# Altium PCB TAUV-Backup_power_PCB.PcbDoc
Units mil, origin at the board's own origin, x right, y up, seen from the top; angles counter-clockwise.
Board outline 4765 x 3420 mil, 2 copper layers (Top Layer, Bottom Layer); 44 components, 16 nets, 156 pads, 79 vias.
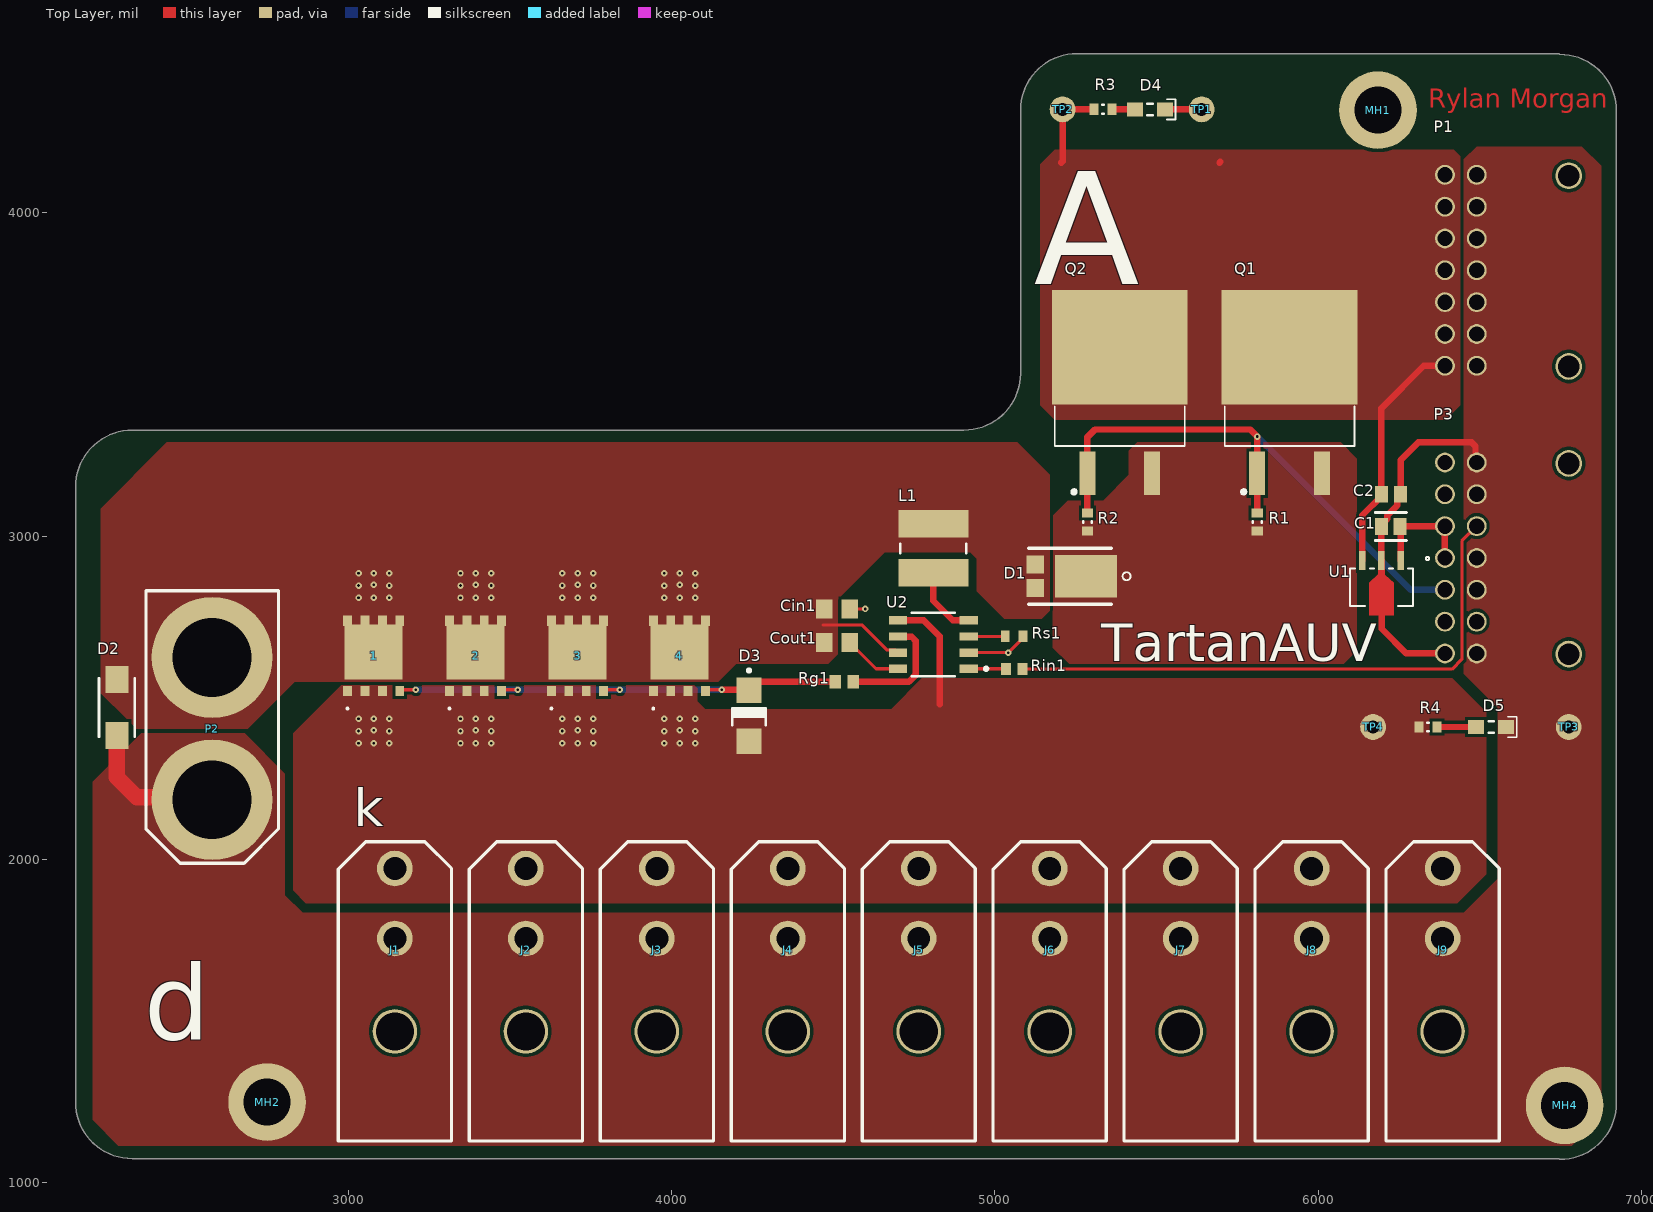
[diagram p0: Top Layer view]
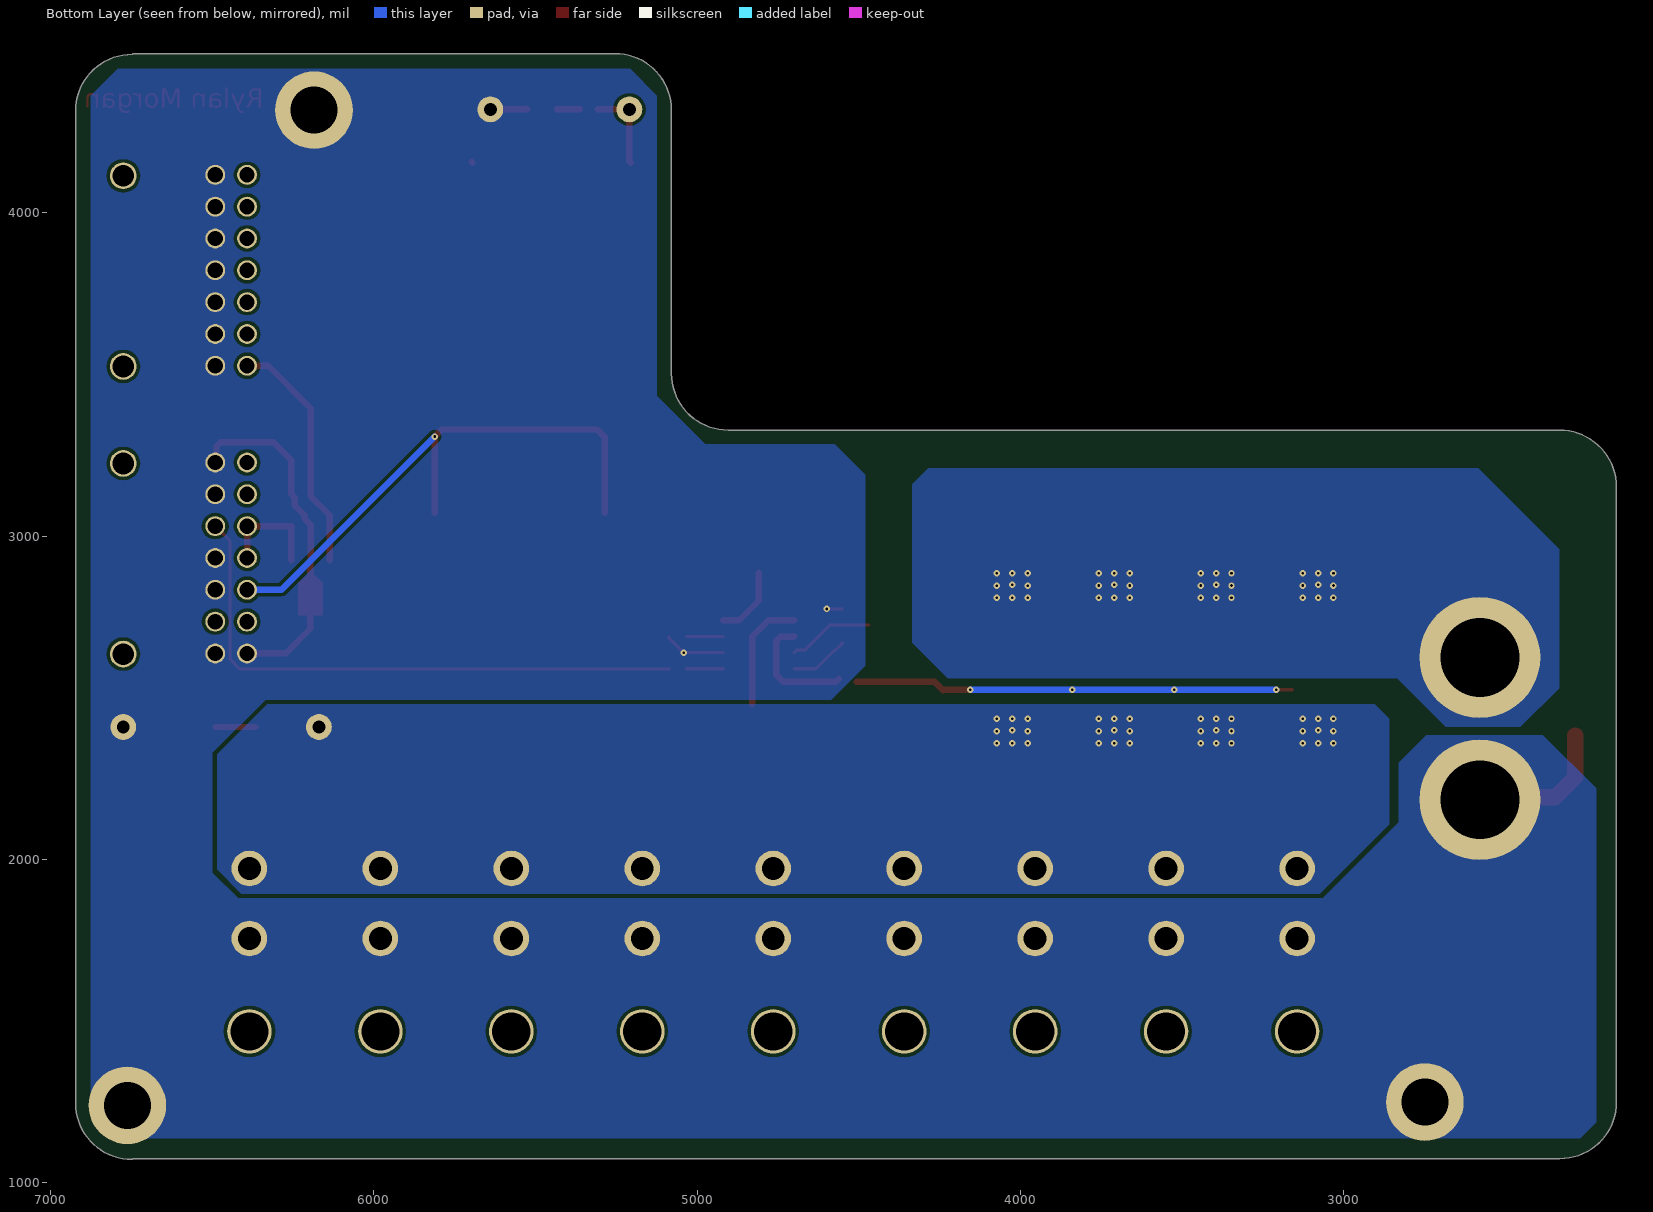
[diagram p1: Bottom Layer view, seen from below]
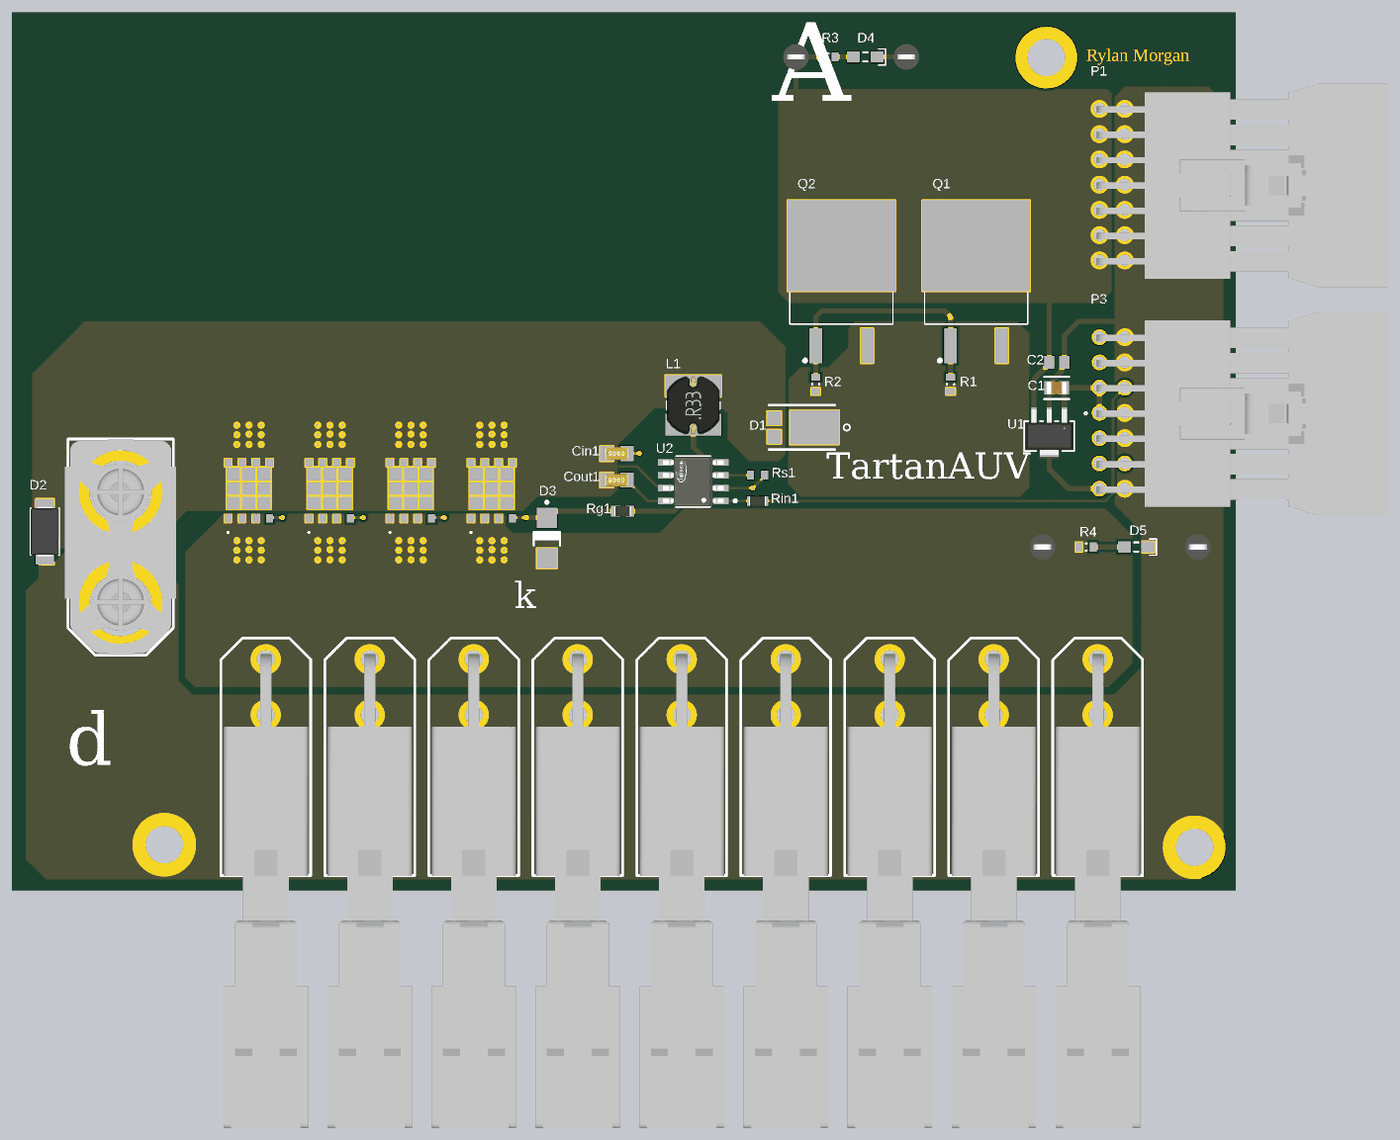
[diagram p2: 3D render of the assembled board from above, using the file's embedded part models]

## Layer stack, top to bottom
Top Solder: solder mask 0.4, Solder Resist, Dk 3.5
Top Layer: signal copper 1.4
Dielectric 1: dielectric 12.6, FR-4, Dk 4.8
Bottom Layer: signal copper 1.4
Bottom Solder: solder mask 0.4, Solder Resist, Dk 3.5

## Board outline
2157.5,1250 2157.5,3152.83 2157.74,3152.83 cw(c2332.74,3152.83) 2332.74,3327.83 4904.67,3327.83 4904.67,3328.04 ccw(c4904.67,3503.04) 5079.67,3503.04 5079.67,4317.43 cw(c5254.68,4317.42) 5254.68,4492.43 5254.68,4492.5 6745,4492.5 6747.5,4490 cw(c6747.5,4315) 6922.5,4315 6922.5,4317.5 6922.5,1247.5 cw(c6747.5,1247.5) 6747.5,1072.5 6745,1075 2332.5,1075 cw(c2332.5,1250)

## Design rules (kind name [scope] priority, off if disabled: settings)
Clearance [All] p1: gap=10 ignorepadtopadclearanceinfootprint=FALSE except(0: Arc-Hole Track-Hole SMDPad-Hole THPad-Hole Via-Hole Fill-Hole Poly-Hole Region-Hole Text-Hole)
PolygonConnect [All] p1: connectstyle=Direct reliefconductorwidth=10 reliefentries=4 polygonreliefangle="90 Angle" airgapwidth=10
RoutingVias [All] p1: holewidth=28 width=50 viastyle="Through Hole" minholewidth=28 minwidth=50 maxholewidth=28 maxwidth=50
SolderMaskExpansion [All] p1: expansion=4 istentingtop=FALSE
Width [All] p1: maxlimit=100 minlimit=8 preferedwidth=10
30 further rules are at their usual default settings.

## Components (designator, comment, footprint, x,y, rotation, side; value= is the part's Value field where it differs from the comment)
1 "BSC0702LSATMA1" TRANS_NexFET_Q5A 3079.06,2630.09 r90 top value=Value
2 "BSC0702LSATMA1" TRANS_NexFET_Q5A 3394.37,2630.09 r90 top value=Value
3 "BSC0702LSATMA1" TRANS_NexFET_Q5A 3709.69,2630.09 r90 top value=Value
4 "DNP" TRANS_NexFET_Q5A 4025,2630 r90 top value=Value
C1 "GRM21BR61E106KA73L" FP-GRM21B-0_15-IPC_C 6225,3030 r0 top
C2 "GRM21BR71H105KA12L" CAPC2013X135X45LL10T25 6225.47,3129.53 r180 top
Cin1 "X7R" C0805 4512.36,2774.64 r180 top value=1uF
Cout1 "X7R" C0805 4512.36,2671.12 r180 top value=1uF
D1 "SBRT15U50SP5-13" SBRT15U50SP5-13 5281.77,2876.22 r270 top
D2 "SMAJ30CA" LFUS-DO-214AC-A-2_V 2285,2470 r270 top
D3 "1SMA5931BT3G" ONSC-SMA-2-403D-02_F_V 4240,2445 r270 top
D4 "LED GREEN" LED_0805 5480,4320 r180 top
D5 "LED GREEN" LED_0805 6535,2410 r180 top
J1 "2-pin megafit" "2-pin Megafit RA" 3145,1130 r0 top
J2 "2-pin megafit" "2-pin Megafit RA" 3550,1130 r0 top
J3 "2-pin megafit" "2-pin Megafit RA" 3955,1130 r0 top
J4 "2-pin megafit" "2-pin Megafit RA" 4360,1130 r0 top
J5 "2-pin megafit" "2-pin Megafit RA" 4765,1130 r0 top
J6 "2-pin megafit" "2-pin Megafit RA" 5170,1130 r0 top
J7 "2-pin megafit" "2-pin Megafit RA" 5575,1130 r0 top
J8 "2-pin megafit" "2-pin Megafit RA" 5980,1130 r0 top
J9 "2-pin megafit" "2-pin Megafit RA" 6385,1130 r0 top
L1 "74477420" WE-PD2-M 4810,2962.21 r90 top
MH1 "DNP" "Mounting Hole #4-40" 6185,4317.5 r0 top
MH2 "DNP" "Mounting Hole #4-40" 2750,1250 r0 top
MH4 "DNP" "Mounting Hole #4-40" 6762.5,1240 r0 top
P1 "14-Pin 2-Row Nano-Fit Right Angle" "MOLEX NANO-FIT 2X7 - Right Angle" 6490.55,3526.97 r90 top
P2 "XT90" XT90 2580,2185 r90 top
P3 "14-Pin 2-Row Nano-Fit Right Angle" "MOLEX NANO-FIT 2X7 - Right Angle" 6490.55,2637.4 r90 top
Q1 "IRF9Z34STRLPBF" TO254P1521X483-4N 5911.77,3444.28 r90 top
Q2 "IRF9Z34STRLPBF" TO254P1521X483-4N 5386.77,3444.28 r90 top
R1 "4K7" RESC0603(1608)_L 5811.77,3044.28 r270 top value="4700.00 Ohm"
R2 "4K7" RESC0603(1608)_L 5286.77,3044.28 r270 top value="4700.00 Ohm"
R3 "1K2" RESC0603(1608)_L 5335,4320 r180 top value="1200.00 Ohm"
R4 "1K2" RESC0603(1608)_L 6340,2410 r180 top value="1200.00 Ohm"
Rg1 "CRCW0603100RFKEA" RESC1609X50X30ML8T20 4535,2550 r180 top
Rin1 "CRCW060310K0FKEA" RESC1609X50X30NL8T20 5060,2589.21 r180 top
Rs1 "RC0603FR-0710RL" RESC1608X55X25NL10T15 5060,2690 r180 top
TP1 "Test Point Loop" "Test Point Loop - Black" 5640,4320 r0 top
TP2 "Test Point Loop" "Test Point Loop - Black" 5210,4320 r0 top
TP3 "Test Point Loop" "Test Point Loop - Black" 6775,2410 r0 top
TP4 "Test Point Loop" "Test Point Loop - Black" 6170,2410 r0 top
U1 "AP7387Q-33Y-13" SOT-89-3_2P7X4P7_ONS 6195.94,2842.5 r180 top
U2 "AUIR3241STR" FP-PG-DSO-8-MFG 4810,2665 r180 top

## Footprints (in the part's own frame and the unit in brackets; to place one, negate y for a bottom-side part, rotate by r counter-clockwise, add the part's x,y. Pads: shape width x height; smd on the part's side, far side on the other; paste and mask are expansions set on the pad)
"2-pin Megafit RA" [mm]
  round 2.8 hole 1.8: 1(0,15.9) 2(0,21.4)
  round 3.5 hole 3: ""(0,8.6)
  silkscreen extent -4.44,0 4.44,23.49, body extent -4.16,-24.98 4.19,21.9, height 16.75
C0805 [mm]
  rect 1.321x1.5 smd: 1(-1,0) 2(1,0)
  body extent -1.25,-0.62 1.25,0.62, height 0.8
CAPC2013X135X45LL10T25 [mm] "Chip Capacitor, 2-Leads, Body 2.00x1.25mm, IPC High Density"
  rect 1x1.3 smd: 1(-0.75,0) 2(0.75,0)
  body extent -1.05,-0.67 1.05,0.68, height 1.35
FP-GRM21B-0_15-IPC_C [mil]
  rect 39.6x51.5 smd paste+0 mask+0: 1(-28.59,0) 2(28.59,0)
  silkscreen extent -48,-43 48,43, body extent -52,-31 52,31, height 10
FP-PG-DSO-8-MFG [mm]
  rect 1.45x0.65 smd paste+0 mask+0: 1(-2.775,1.905) 2(-2.775,0.635) 3(-2.775,-0.635) 4(-2.775,-1.905) 5(2.775,-1.905) 6(2.775,-0.635) 7(2.775,0.635) 8(2.775,1.905)
  silkscreen extent -4.28,-2.5 1.68,2.5, body extent -3.6,-2.6 3.6,2.6, height 0.25
LED_0805 [mm] "Liteon 0805 Chip LED"
  rect 1.25x1.1 smd: 1(-1.175,0) 2(1.175,0)
  silkscreen extent -2.01,-0.8 0.2,0.8, body extent -1,-0.63 1,0.63, height 0.8
LFUS-DO-214AC-A-2_V [mm] "Molded Diode, 2-Leads, Body 4.6x2.79mm"
  rect 2.1x1.8 smd: 1(-2.2,0) 2(2.2,0)
  silkscreen extent -2.3,-1.4 2.3,1.4, body extent -2.52,-1.4 2.52,1.4, height 2.29
"MOLEX NANO-FIT 2X7 - Right Angle" [mm]
  round 1.56 hole 1.2: 1(15,2.5) 2(12.5,2.5) 3(10,2.5) 4(7.5,2.5) 5(5,2.5) 6(2.5,2.5) 7(0,2.5) 8(15,0) 9(12.5,0) 10(10,0) 11(7.5,0) 12(5,0) 13(2.5,0) 14(0,0)
  round 2.1 hole 1.7: ""(-0.05,-7.225) ""(14.925,-7.225)
  body extent -2.68,-26.05 17.53,2.78, height 10.21
"Mounting Hole #4-40" [mm] "Mounting Hole for ANSI #4-40 w/ Flat Washer, Loose Fit"
  round 6.1 hole 3.7: 0(0,0)
ONSC-SMA-2-403D-02_F_V [mm] "Molded, 2-Leads, Body 4.32x2.6mm"
  rect 2x2 smd: 1(-2,0) 2(2,0)
  silkscreen extent -3.67,-1.3 0.74,1.3, body extent -2.16,-1.3 2.16,1.3, height 2.2
RESC0603(1608)_L [mm] "Chip Resistor, Body 1.6x0.8mm, IPC High Density"
  rect 0.7x0.9 smd: 1(-0.7,0) 2(0.7,0)
  silkscreen extent -0.05,-0.35 0.05,0.35, body extent -0.85,-0.47 0.85,0.47, height 0.6
RESC1608X55X25NL10T15 [mm] "Chip Resistor, 2-Leads, Body 1.70x0.90mm, IPC Medium Density"
  rect 0.7x0.9 smd: 1(-0.7,0) 2(0.7,0)
  body extent -0.85,-0.45 0.85,0.45, height 0.55
RESC1609X50X30ML8T20 [mm] "Chip Resistor, 2-Leads, Body 1.65x0.95mm, IPC Low Density"
  rect 0.9x1.05 smd: 1(-0.7,0) 2(0.7,0)
  body extent -0.82,-0.48 0.82,0.48, height 0.5
RESC1609X50X30NL8T20 [mm] "Chip Resistor, 2-Leads, Body 1.65x0.95mm, IPC Medium Density"
  rect 0.8x0.95 smd: 1(-0.65,0) 2(0.65,0)
  body extent -0.82,-0.48 0.82,0.48, height 0.5
SBRT15U50SP5-13 [mm]
  rect 1.39x1.4 smd: 1(-0.92,-3.982) 1(0.92,-3.982)
  rect 3.36x4.86 smd: 2(0,0)
  silkscreen extent -2.2,-4.5 2.2,3.52, body extent -2,-4.6 2,2.4, height 1.05
SOT-89-3_2P7X4P7_ONS [mil]
  rect 20x59 smd paste+0 mask+0: 1(-59.06,-82.5) 2(0,-82.5) 3(59.06,-82.5)
  Top Layer region: 10,-53 -10,-53 -10,-39 -38,-13 -38,87 38,87 38,-13 10,-40
  silkscreen extent -148,-93 98,58, body extent -93,-104 93,73, height 69
"Test Point Loop - Black" [mil] ", black"
  round 80 hole 40: 1(0,0)
  body extent -50,-50 50,50, height 180
TO254P1521X483-4N [mil]
  rect 135x49.49 smd: 1(-250,100) 3(-250,-100)
  rect 355x420 smd: 4(140,0)
  silkscreen extent -316,-201 -43,201
TRANS_NexFET_Q5A [mm]
  rect 0.8x0.7 smd paste-0.387: 1(-2.752,2.055) 2(-2.752,0.685) 3(-2.752,-0.685) 4(-2.752,-2.055) 5(2.752,-2.055) 6(2.752,-0.685) 7(2.752,0.685) 8(2.752,2.055)
  rect 4.3x4.56 smd paste-2.267 mask+0.025: 9(0.3,0)
  silkscreen extent -4.22,1.98 -4.07,2.13, body extent 0,0 0.25,0.25, height 0.25
WE-PD2-M [mm] "SMD Inductor, 2-Leads, Body 5.8 x 5.2 mm"
  rect 2.15x5.5 smd: 1(-1.925,0) 2(1.925,0)
  silkscreen extent -0.38,-2.6 0.38,2.6, body extent -2.89,-2.6 2.89,2.6, height 4.49
XT90 [mm]
  round 9.5 hole 6.2: 1(0,0) 2(11.176,0)
  silkscreen extent -4.99,-5.21 16.41,5.21, body extent -4.99,-5.5 16.41,5.5, height 20.7

## Part data
1 2 3: "No Description Available", Manufacturer_Name="Texas Instruments", Manufacturer_Part_Number=CSD18537NQ5A, Copyright="Copyright (C) 2018 Accelerated Designs. All rights reserved", Datasheet_URL=http://www.ti.com/lit/ds/symlink/csd18537nq5a.pdf, IdsMax=50.0, QgTyp=14.0, Quantity=1, Rdson45=0.014559, RefDes=RefDes, Type=TYPE, VdsMax=60.0, Vendor="Texas Instruments"
4: library part BSC0702LSATMA1, "No Description Available", Manufacturer_Name="Texas Instruments", Manufacturer_Part_Number=CSD18537NQ5A, Copyright="Copyright (C) 2018 Accelerated Designs. All rights reserved", Datasheet_URL=http://www.ti.com/lit/ds/symlink/csd18537nq5a.pdf, IdsMax=50.0, QgTyp=14.0, Quantity=1, Rdson45=0.014559, RefDes=RefDes, Type=TYPE, VdsMax=60.0, Vendor="Texas Instruments"
C1: library part CMP-2007-03541-2, "Chip Multilayer Ceramic Capacitors for General Purpose, 0805, 10uF, X5R, 15%, 10%, 25V", Capacitance=10uF, Case Code (Imperial)=0805, Case Code (Metric)=2012, Dielectric=X5R, Max Operating Temperature=85°C, Min Operating Temperature=-55°C, Package Quantity=1, Tolerance=10%, Voltage=25V, Case/Package=0805, Depth=1.25mm, Height=1.25mm, Lead Free="Lead Free", Length=2mm, Material=Ceramic, Mount="Surface Mount", Packaging="Tape and Reel", Radiation Hardening=No, Termination=SMD/SMT, Thickness=0.053inch, Voltage Rating=25V, Voltage Rating (DC)=25V, Width=0.049inch
C2: library part CMP-1036-04761-2, "1uF", Manufacturer=Murata, Part Number=GRM21BR71H105KA12L
Cin1 Cout1: library part Cap, "Capacitor", LatestRevisionDate=17-Jul-2002, LatestRevisionNote="Re-released for DXP Platform.", PackageDescription="Radial Cap, Thru-Hole; 2 Leads; 0.3 in Pin Spacing", PackageReference=RAD-0.3, Published=8-Jun-2000, Publisher="Altium Limited"
D1: Capacitance @ Vr, F=-, Current - Average Rectified (Io)=15A, Manufacturer="Diodes Incorporated", Operating Temperature - Junction="-65°C ~ 150°C", Package / Case="PowerDI™ 5", Supplier Device Package=PowerDI®5, Supplier Part Number 1=SBRT15U50SP5-13DICT-ND, Category="Discrete Semiconductor Products", ComponentLink1Description=https://media.digikey.com/pdf/Data%20Sheets/Diodes%20PDFs/SBRT15U50SP5.pdf, ComponentLink1URL=https://media.digikey.com/pdf/Data%20Sheets/Diodes%20PDFs/SBRT15U50SP5.pdf, Diode Type="Super Barrier", Manufacturer Part Number=SBRT15U50SP5-13, Mounting Type="Surface Mount", Packaging="Cut Tape (CT)", Part Status=Active, Pricing 1="1=0.93, 10=0.823, 100=0.6306, 500=0.49852, 1000=0.39882 (USD)", RoHS="RoHS Compliant", Speed="Fast Recovery =< 500ns, > 200mA (Io)", Stock 1=12134, Supplier 1=Digi-Key
D2: library part CMP-2000-07088-1, "Transient Voltage Suppression Diode, 30 V, -65 to 150 degC, 2-Pin SMD, RoHS, Tape and Reel", Capacitance @ Frequency=-, Current - Peak Pulse (10/1000µs)=8.3A, Manufacturer=Littelfuse-Inc., Operating Temperature=-55°C~150°C(TJ), Package / Case=DO-214AC,SMA, Package Description="2-Pin Surface Mount Device, Body 4.295 x 2.595 mm", Package Reference=DO-214AC, Power - Peak Pulse=400W, Power Line Protection=No, Supplier Device Package=DO-214AC(SMA), Voltage - Breakdown (Min)=33.3V, Voltage - Clamping (Max) @ Ipp=48.4V, Voltage - Reverse Standoff (Typ)=30V, Applications=GeneralPurpose, Bidirectional Channels=1, Category=CircuitProtection, Datasheet URL=http://www.littelfuse.com/~/media/electronics/datasheets/tvs_diodes/littelfuse_tvs_diode_smaj_datasheet.pdf.pdf, Datasheet Version=11/2015, Family=TVS-Diodes, Manufacturer URL=http://www.littelfuse.com/, Mounting Technology=SurfaceMount, Mounting Type=SurfaceMount, Packaging=Digi-Reel®, Series=SMAJ, Type=Zener, Unidirectional Channels=-
D3: library part CMP-1060-00118-1, "1.5 W Zener Voltage Regulator, 2-Pin SMA, Pb-Free, Tape and Reel", Manufacturer="On Semiconductor", ComponentLink1Description="Manufacturer URL", ComponentLink1URL=http://www.onsemi.com/, ComponentLink2Description=Datasheet, ComponentLink2URL=http://www.onsemi.com/pub_link/Collateral/1SMA5913BT3-D.PDF, ComponentLink3Description="Package Specification", ComponentLink3URL=http://www.onsemi.com/pub_link/Collateral/1SMA5913BT3-D.PDF, DatasheetVersion="Rev. 8", Mounting Technology="Surface Mount", PackageDescription="2-Pin Small Molded Package, J-Bend Lead, Body 2.605 x 4.315 mm", PackageReference=SMA-2-403D-02_F, PackageVersion="Rev. F, 11/2008", Packing="Tape and Reel", PartNumber=1SMA5931BT3G, RoHS=Pb-Free, VZ Typ (V)=18
D4 D5: library part LED0, "led", Color=Green, Current - Test=20mA, Lens Color=Colorless, Manufacturer="Lite-On Inc.", Manufacturer Part Number=LTST-C171KGKT, Millicandela Rating=35mcd, Package / Case="0805 (2012 Metric)", Supplier Part Number 1=160-1426-1-ND, Voltage - Forward (Vf) (Typ)=2V, Category=Optoelectronics, ComponentLink1Description=http://optoelectronics.liteon.com/upload/download/DS22-2000-118/LTST-C171KGKT.pdf, ComponentLink1URL=http://optoelectronics.liteon.com/upload/download/DS22-2000-118/LTST-C171KGKT.pdf, Features=-, Height (Max)=0.90mm, Lens Style/Size="Rectangle with Flat Top, 1.40mm x 1.25mm", Lens Transparency=Clear, Mounting Type="Surface Mount", Packaging="Cut Tape (CT)", Part Status=Active, Pricing 1="1=0.31, 10=0.225, 25=0.1656, 100=0.1183, 250=0.0804, 500=0.07096, 1000=0.05558 (USD)", RoHS="RoHS Compliant", Size / Dimension="2.00mm L x 1.25mm W", Stock 1=350441, Supplier 1=Digi-Key, Viewing Angle=130°, Wavelength - Dominant=571nm, Wavelength - Peak=574nm
L1: library part CMP-0227-00441-1, "SMD Power Inductor WE-PD2, L = 100 µH", Inductance="100 ÂµH", ComponentLink1Description="Manufacturer Link", ComponentLink1URL=http://www.we-online.com, ComponentLink2Description=Datasheet, ComponentLink2URL=http://www.we-online.de/katalog/media/pdf/74477420.pdf, DatasheetVersion="ver 2, Jun-2005", PackageDescription="SMD Inductor, 2-Leads, Body 5.8 x 5.2 mm", PackageReference=WE-PD2-M, PackageVersion=2005
MH1 MH2 MH4: library part "Mounting Hole #4-40, Loose Fit", "Mounting Hole for ANSI #4-40 w/ Flat Washer, Loose Fit", Datasheet=http://blogs.mentor.com/tom-hausherr/blog/tag/pcb-mounting-holes/
P1 P3: "NanoFit Right Hdr TH DR 14Ckt", Manufacturer=Molex, Part Number=105314-1214, Supplier Part Number=538-105314-1214, ComponentLink1Description="Mouser Link", ComponentLink1URL=https://www.mouser.com/ProductDetail/Molex/105314-1214?qs=PqFvFmEiOr6wLIXpvlvqbA%3D%3D, Supplier=Mouser, Supplier 1=Mouser, Supplier Part Number 1=538-105314-1214
Q1 Q2: "P-Channel 60V 18A _Tc_ 3.7W _Ta_, 88W _Tc_ Surface Mount D2PAK", Package="D2PAK Vishay", Availability=Unavailable, MF=Vishay, MP=IRF9Z34STRLPBF, Price=None, SnapEDA_Link=https://www.snapeda.com/parts/IRF9Z34STRLPBF/Vishay%20Siliconix/view-part/813693/?ref=snap
R1 R2: library part CMP-1012-00586-1, "4K7 0.1W 1% 0603 (1608 Metric)  SMD", Case-EIA=0603, Case-Metric=1608, Power="0.1 W", Tolerance="1 %", Technology=SMT
R3 R4: library part CMP-1012-00518-1, "1K2 0.1W 1% 0603 (1608 Metric)  SMD", Case-EIA=0603, Case-Metric=1608, Power="0.1 W", Tolerance="1 %", Technology=SMT
Rg1: library part CMP-2000-03824-5, "Chip Resistor, 100 Ohm, +/- 1%, 100 mW,-55 to 155 degC, 0603 (1608 Metric), RoHS, Tape and Ree", Manufacturer="Vishay Semiconductor", ComponentLink1Description="Manufacturer URL", ComponentLink1URL=http://www.vishay.com/, ComponentLink2Description=Datasheet, ComponentLink2URL=http://www.vishay.com/docs/20035/dcrcwe3.pdf, DatasheetVersion=06/2012, Mounting Technology="Surface Mount", PackageDescription="2-Pin Surface Mount Device, Body 1.575 x 0.85 mm", PackageReference=0603
Rin1: library part CMP-1666-00005-4, "Chip Resistor, 10 KOhm, +/- 1%, 100 mW, -55 to 155 degC, 0603 (1608 Metric), RoHS, Tape and Reel", Manufacturer="Vishay Semiconductor", Max Operating Temperature="155 degC", Min Operating Temperature="-55 degC", Package Quantity=5000, Voltage Rating="75 V", ComponentLink1Description="Manufacturer URL", ComponentLink1URL=http://www.vishay.com/, ComponentLink2Description=Datasheet, ComponentLink2URL=https://datasheet.ciiva.com/11809/0900766b80d98afc-11809037.pdf, DatasheetVersion=06/2012, Height="0.45 mm", Length="1.55 mm", Mounting Technology="Surface Mount", PackageDescription="2-Pin Surface Mount Device, Body 1.575 x 0.85 mm", PackageReference=0603, Packaging="Tape and Reel", REACH SVHC=Unknown, RoHSCompliant=true
Rs1: library part CMP-1659-00008-4, "Chip Resistor, 10 Ohm, +/- 1%, 0.1 W, -55 to 155 degC, 0603 (1608 Metric), RoHS, Tape and Reel", Manufacturer=Yageo, Max Operating Temperature="155 degC", Min Operating Temperature="-55 degC", Package Quantity=200, Voltage Rating="50 V", ComponentLink1Description="Manufacturer URL", ComponentLink1URL=http://www.yageo.com/, ComponentLink2Description=Datasheet, ComponentLink2URL=http://www.yageo.com/documents/recent/PYu-RC_Group_51_RoHS_L_04.pdf, ComponentLink3Description="Package Specification", ComponentLink3URL=http://www.farnell.com/datasheets/443971.pdf, DatasheetVersion="Rev. 4, 02/2016", Height="0.45 mm", Length="1.6 mm", Mount="Surface Mount", Mounting Technology="Surface Mount", PackageDescription="2-Pin Surface Mount Device, Body 1.6 x 0.8 mm", PackageReference=0603, Packaging="Tape and Reel", Pins=2, REACH SVHC="No SVHC", RoHSCompliant=true
TP1 TP2 TP3 TP4: "Keyston Electronics 5001 Test Point Loop", Color=Black, Manufacturer="Keystone Electronics", Manufacturer P/N=5001, Supplier Part Number 1=36-5001-ND, Supplier 1=Digi-Key
U1: "No Description Available", Mfr_Name=onsemi, RefDes=RefDes, Type=Type
U2: library part CMP-32851-000034-1, "IC GATE DRVR HIGH-SIDE 8SO", Case/Package=SOIC, Max Operating Temperature=150°C, Min Operating Temperature=-40°C, Output Current=300mA, Halogen Free="Halogen Free", Lead Free="Lead Free", Mount="Surface Mount", Number of Drivers=1, Number of Pins=8, Packaging="Cut Tape", RoHS Compliant=Yes

## Via types
v1: diameter 20, hole 8, Top Layer to Bottom Layer, 79 vias

## Nets (pads, with @x,y where several pads share a name; then routed paths per layer and width w, separated by ;. In a path a pad name is that pad's centre, name@x,y a point inside that pad or via, vN(x,y) a via of type N, cw(c..) or ccw(c..) an arc to the next point about the centre after c; other vN are vias at no path point)
EN_N: P3.5 Q1.1 Q2.1 R1.1 R2.1 | length 1791.6
  Top Layer w20: R2.1 5286.77,3306.77 5310,3330 5790,3330 v1(5811.77,3308.23) Q1.1 R1.1
  Bottom Layer w20: v1(5811.77,3308.23) 6285.75,2834.25 P3.5
GND: C1.1 C2.1 Cin1.1 D2.2 D4.1 D5.1 J1.1 J2.1 J3.1 J4.1 J5.1 J6.1 J7.1 J8.1 J9.1 MH1.0 MH2.0 MH4.0 P1.8 P1.9 P1.10 P1.11 P1.12 P1.13 P1.14 P2.1 P3.7 P3.8 P3.9 P3.11 P3.12 P3.14 Rs1.1 TP1.1 TP3.1 U1.2 U2.2 | length 1893.8
  Top Layer w10: Cin1.1 4552.1,2775 v1(4600,2775) ; U2.2 v1(5041.5,2640) 5087.56,2686.06 Rs1.1
  Top Layer w20: D4.1@5527.51,4321.25 D4.1 TP1.1 ; MH1.0@6183.75,4316.25 MH1.0 ; U1.2 6195.94,3035.49 6213.79,3053.34 6213.79,3064.04 6245,3095.24 6245,3102.22 6245.31,3102.54 6245.31,3119.84 C2.1 6255,3235 6310,3290 6475,3290 6486.72,3278.28 6486.72,3231.79 P3.8 ; U1.2@6196.41,2925 6196.41,2713.59 6272.6,2637.4 P3.7
  Top Layer w50: D2.2 2285,2255 2347.28,2192.72 2572.28,2192.72 P2.1
NetCout1_1: Cout1.1 U2.8 | length 184.7
  Top Layer w10: Cout1.1 4551.73,2667.59 4572.73,2646.59 4576.26,2646.59 4632.85,2590 U2.8
NetD1_2: D1.2 Q1.3 Q2.3 R1.2 R2.2
NetD4_2: D4.2 R3.1 | length 71.2
  Top Layer w20: R3.1 D4.2
NetD5_2: D5.2 R4.1 | length 121.2
  Top Layer w20: R4.1 D5.2
NetL1_1: L1.1 U2.4 | length 220.5
  Top Layer w20: L1.1 4810,2800 4870,2740 U2.4
NetRg1_1: Rg1.1 U2.6 | length 371.4
  Top Layer w20: Rg1.1@4562.56,2558.75 4562.56,2557.72 4570.28,2550 4734.53,2550 4755,2570.47 4755,2677.06 4743.28,2688.77 4701.98,2688.77 U2.6
NetRin1_2: Rin1.2 U2.1 | length 115.5
  Top Layer w10: U2.1 5033.62,2590 Rin1.2
NetRs1_2: Rs1.2 U2.3 | length 113.2
  Top Layer w10: U2.3 Rs1.2
THRST_EN_P: P3.10 Rin1.1 | length 1802.1
  Top Layer w10: Rin1.1 6414.21,2589.21 6444.84,2619.84 6444.84,2985.39 P3.10
THRUSTERS_GATE: 1.4 2.4 3.4 4.4 D3.1 Rg1.2 | length 1509
  Top Layer w10: 1.4@3159.96,2525 v1(3210,2525) ; 2.4@3475.28,2525 v1(3525.31,2525) ; 3.4@3790.59,2525 v1(3840.63,2525) ; 4.4@4105.91,2524.91 v1(4155.94,2524.91) ; D3.1@4238.83,2524.91 D3.1
  Top Layer w20: v1(4155.94,2524.91) D3.1@4238.83,2524.91 ; D3.1 4266.26,2550 Rg1.2
  Bottom Layer w20: v1(3210,2525) v1(3525.31,2525) v1(3840.63,2525) 3840.72,2524.91 v1(4155.94,2524.91)
V3P3_LE: C1.2 P3.3 P3.4 U1.1 | length 343
  Top Layer w20: U1.1 6255,3028.59 C1.2 6254.14,3030.55 6391.57,3030.55 P3.3 P3.4
VBATT: 1.5 1.6 1.7 1.8 1.9 2.5 2.6 2.7 2.8 2.9 3.5 3.6 3.7 3.8 3.9 4.5 4.6 4.7 4.8 4.9 Cin1.2 Cout1.2 D1.1 D2.1 L1.2 P2.2 U2.7 | length 266
  Top Layer w10: 4470,2725 4590,2725 4667.2,2647.8 4692.95,2647.8 U2.7
  other v1: 3032.5,2810 3080,2810 3127.5,2810 3347.81,2810 3395.31,2810 3442.81,2810 3663.13,2810 3710.63,2810 3758.13,2810 3978.44,2809.91 4025.94,2809.91 4073.44,2809.91 3978.44,2847.41 4073.44,2847.41 3032.5,2847.5 3127.5,2847.5 3347.81,2847.5 3442.81,2847.5 3663.13,2847.5 3758.13,2847.5 3080,2850 3395.31,2850 3710.63,2850 4025.94,2849.91 3032.5,2885 3080,2885 3127.5,2885 3347.81,2885 3395.31,2885 3442.81,2885 3663.13,2885 3710.63,2885 3758.13,2885 3978.44,2884.91 4025.94,2884.91 4073.44,2884.91
VBATT_FILT: C2.2 P1.1 P1.2 P1.3 P1.4 P1.5 P1.6 P1.7 Q1.4 Q2.4 R3.2 TP2.1 U1.3 | length 1013.8
  Top Layer w20: 5205,4155 5210,4160 TP2.1 R3.2 ; 5695,4155 5697.44,4157.44 ; U1.3 6136.89,3064.57 6195.94,3123.62 C2.2 6195.94,3395.94 6326.97,3526.97 P1.7
VTHRST: 1.1 1.2 1.3 2.1 2.2 2.3 3.1 3.2 3.3 4.1 4.2 4.3 D3.2 J1.2 J2.2 J3.2 J4.2 J5.2 J6.2 J7.2 J8.2 J9.2 R4.2 TP4.1 U2.5 | length 359
  Top Layer w20: U2.5 4780,2740 4830,2690 4830,2480.93
  other v1: 3032.5,2360 3080,2360 3127.5,2360 3347.81,2360 3395.31,2360 3442.81,2360 3663.13,2360 3710.63,2360 3758.13,2360 3978.44,2359.91 4025.94,2359.91 4073.44,2359.91 3978.44,2397.41 4073.44,2397.41 3032.5,2397.5 3127.5,2397.5 3347.81,2397.5 3442.81,2397.5 3663.13,2397.5 3758.13,2397.5 3080,2400 3395.31,2400 3710.63,2400 4025.94,2399.91 3032.5,2435 3080,2435 3127.5,2435 3347.81,2435 3395.31,2435 3442.81,2435 3663.13,2435 3710.63,2435 3758.13,2435 3978.44,2434.91 4025.94,2434.91 4073.44,2434.91
pads on no net: J1. J2. J3. J4. J5. J6. J7. J8. J9. P1. P3. P3.1 P3.2 P3.6 P3.13

## Polygon pours and split planes (outlines as drawn)
VTHRST on Top Layer "VTHRST_L01_P009" (solid, pour order 9): 2980,2540 2830,2390 2830,1905 2870,1865 6430,1865 6520,1955 6520,2455 6415,2560 4775,2560 4680,2465 4105,2465 4080,2490 4080,2530 4065,2545
VBATT_FILT on Top Layer "VBATT_FILT_L01_P017" (solid, pour order 17): 5140,3405 5185,3360 6395,3360 6440,3405 6440,4175 6420,4195 5185,4195 5140,4150
NetD1_2 on Top Layer "NETD1_2_L01_P016" (solid, pour order 16): 5180,3065 5225,3110 5335,3110 5415,3190 5415,3265 5440,3290 6070,3290 6120,3240 6120,2645 6080,2605 5230,2605 5180,2655
GND on Top Layer "GND_L01_P015" (solid, pour order 15): 2860,1835 2805,1890 2805,2265 2680,2390 2360,2390 2210,2240 2210,1195 2290,1115 6785,1115 6875,1205 6875,4145 6815,4205 6490,4205 6450,4165 6450,2575 6555,2470 6555,1940 6450,1835
VBATT on Top Layer "VBATT_L01_P006" (solid, pour order 6): 4945,2930 4925,2950 4660,2950 4515,2805 4515,2635 4485,2605 4200,2605 4145,2550 2835,2550 2690,2405 2345,2405 2235,2515 2235,3085 2440,3290 5070,3290 5170,3190 5170,2770 5145,2745 5030,2745 4945,2830
GND on Bottom Layer "Bottom Layer-GND" (solid, pour order 12): 4480,3190 4575,3285 4975,3285 5125,3435 5125,4362.74 5207.26,4445 6792.5,4445 6875,4362.5 6875,1225 6787.5,1137.5 2270,1137.5 2220,1187.5 2220,2220 2385,2385 2745,2385 2830,2300 2830,2115 3065,1880 6420,1880 6500,1960 6500,2330 6335,2495 4585,2495 4480,2600
VTHRST on Bottom Layer "VTHRST_L02_P014" (solid, pour order 14): 2905,2480 2860,2435 2860,2110 3075,1895 6410,1895 6485,1970 6485,2325 6330,2480
VBATT on Bottom Layer "VBATT_L02_P013" (solid, pour order 13): 4285,3210 4335,3160 4335,2670 4225,2560 2835,2560 2685,2410 2455,2410 2335,2530 2335,2960 2585,3210

## Other copper
Top Layer:
  text "Rylan Morgan" at 6340,4304.43 h100

## Silkscreen, mask and mechanical layers (free items; w line width, h text height)
Top Overlay:
  text "A" at 5120,3665 h600
  text "TartanAUV" at 5330,2575 h200
  text "k" at 3017.91,2065 h200
  text "d" at 2370,1365 h400
Top Solder:
  text "Rylan Morgan" at 6340,4304.43 h100
Mechanical 7:
  lines w10: 2157.5,3152.83 2157.5,1250 ccw(c2332.5,1250) 2332.5,1075 6745,1075 ; 2157.74,3152.83 cw(c2332.74,3152.83) 2332.74,3327.83 4904.67,3327.83 ; 4904.67,3328.04 ccw(c4904.67,3503.04) 5079.67,3503.04 5079.67,4317.43 ; 5079.68,4317.43 cw(c5254.68,4317.43) 5254.68,4492.43 ; 5254.68,4492.5 6745,4492.5 ; 6747.5,1072.5 ccw(c6747.5,1247.5) 6922.5,1247.5 6922.5,4317.5 ; 6747.5,4490 cw(c6747.5,4315) 6922.5,4315